# Altium PCB reciever_contact.PcbDoc
Units mil, origin at the board's own origin, x right, y up, seen from the top; angles counter-clockwise.
Board outline 779.53 x 602.36 mil, 2 copper layers (Top Layer, Bottom Layer), stack 62.992 mil thick; 1 components, 4 nets, 13 pads, 4 vias.
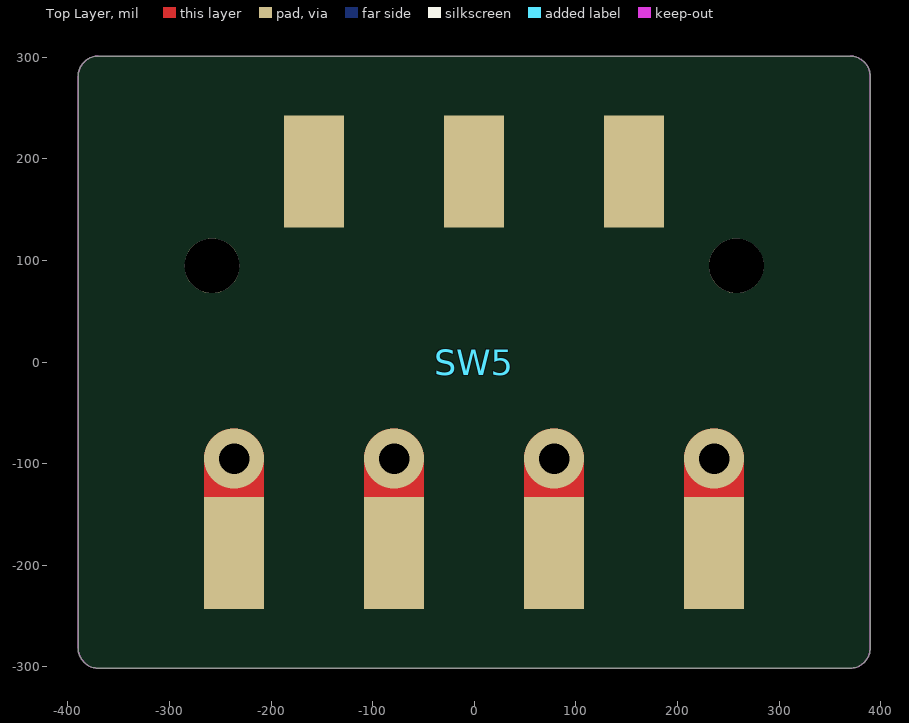
[diagram p0: Top Layer view]
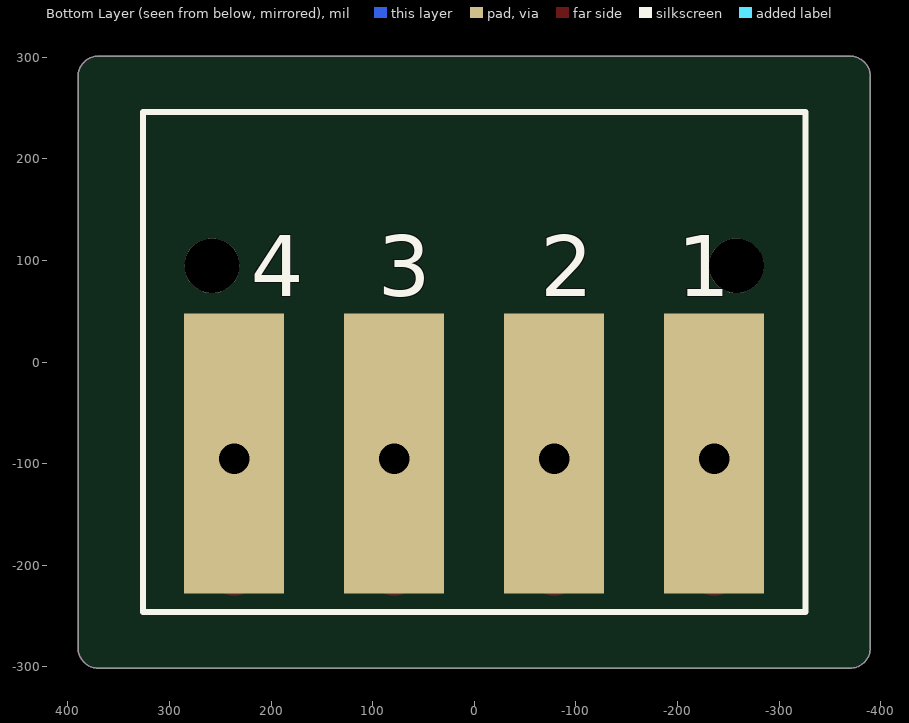
[diagram p1: Bottom Layer view, seen from below]

## Layer stack, top to bottom
Top Layer: signal copper (thickness not stored)
Dielectric 1: dielectric 62.9921, FR-4, Dk 4.8
Bottom Layer: signal copper (thickness not stored)

## Board outline
-389.76,-281.5 -389.76,281.5 cw(c-370.08,281.5) -370.08,301.18 370.08,301.18 cw(c370.08,281.5) 389.76,281.5 389.76,-281.5 cw(c370.08,-281.5) 370.08,-301.18 -370.08,-301.18 cw(c-370.08,-281.5)

## Design rules (kind name [scope] priority, off if disabled: settings)
Clearance [All] p1: gap=10
PolygonConnect [All] p1: connectstyle=Relief reliefconductorwidth=10 reliefentries=4 polygonreliefangle="90 Angle" airgapwidth=10
RoutingVias [All] p1: holewidth=28 width=50 viastyle="Through Hole" minholewidth=28 minwidth=50 maxholewidth=28 maxwidth=50
SolderMaskExpansion [All] p1: expansion=4
Width [All] p1: maxlimit=393.7 minlimit=10 preferedwidth=10
30 further rules are at their usual default settings.

## Components (designator, comment, footprint, x,y, rotation, side; value= is the part's Value field where it differs from the comment)
SW5 "Comment" battery_4pin 0,0 r0 top

## Footprints (in the part's own frame and the unit in brackets; to place one, negate y for a bottom-side part, rotate by r counter-clockwise, add the part's x,y. Pads: shape width x height; smd on the part's side, far side on the other; paste and mask are expansions set on the pad)
battery_4pin [mm]
  round 1.37 hole 1.37: 0(-6.555,2.41) 0(6.555,2.41)
  rect 1.5x2.8 smd: 0(-4,4.765) 0(0,4.765) 0(4,4.765) 1(-6,-4.765) 2(-2,-4.765) 3(2,-4.765) 4(6,-4.765)
  body extent -7.85,-5.6 7.85,5.6, height 5.69

## Free pads (board coordinates)
  rect 98.43x275.59 smd far side: 1(-236.22,-90) 2(-78.74,-90) 3(78.74,-90) 4(236.22,-90)

## Via types
v1: diameter 59.06, hole 30, Top Layer to Bottom Layer, tented both sides, 4 vias

## Nets (pads, with @x,y where several pads share a name; then routed paths per layer and width w, separated by ;. In a path a pad name is that pad's centre, name@x,y a point inside that pad or via, vN(x,y) a via of type N, cw(c..) or ccw(c..) an arc to the next point about the centre after c; other vN are vias at no path point)
PIN1: pad.1 SW5.1 | length 105
  Top Layer w59.06: SW5.1@-236.22,-200 v1(-236.22,-95)
PIN2: pad.2 SW5.2 | length 105
  Top Layer w59.06: SW5.2@-78.74,-200 v1(-78.74,-95)
PIN3: pad.3 SW5.3 | length 105
  Top Layer w59.06: SW5.3@78.74,-200 v1(78.74,-95)
PIN4: pad.4 SW5.4 | length 105
  Top Layer w59.06: SW5.4@236.22,-200 v1(236.22,-95)
pads on no net: SW5.0

## Keep-outs
Keep-Out Layer:
  the board outline again, w1

## Silkscreen, mask and mechanical layers (free items; w line width, h text height)
Bottom Overlay:
  lines w6: -325.98,-246.06 325.98,-246.06 325.98,246.06 -325.98,246.06 -325.98,-246.06
  text "1" at -200,65 h60
  text "2" at -65,65 h60
  text "3" at 95,65 h60
  text "4" at 220,65 h60